# Altium PCB PCB.PcbDoc
Units mm, origin at the board's own origin, x right, y up, seen from the top; angles counter-clockwise.
Board outline 51.43 x 30.99 mm, 2 copper layers (Top Layer, Bottom Layer); 20 components, 9 nets, 53 pads, 6 vias.
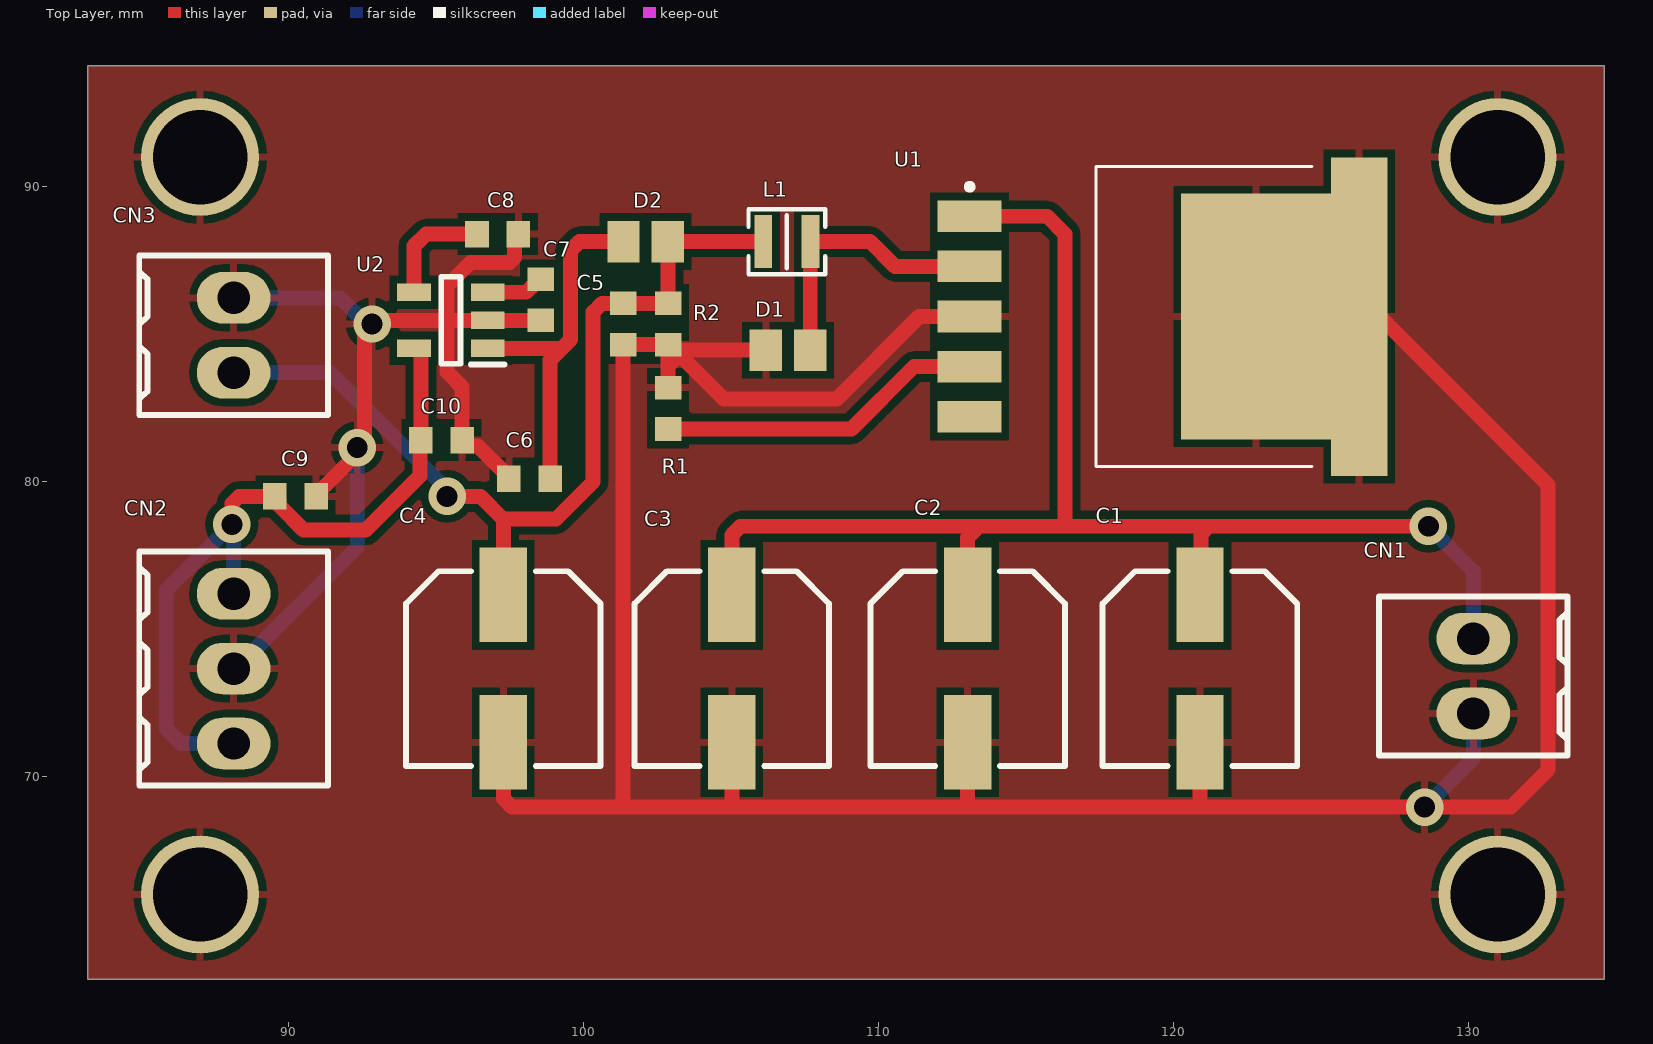
[diagram p0: Top Layer view]
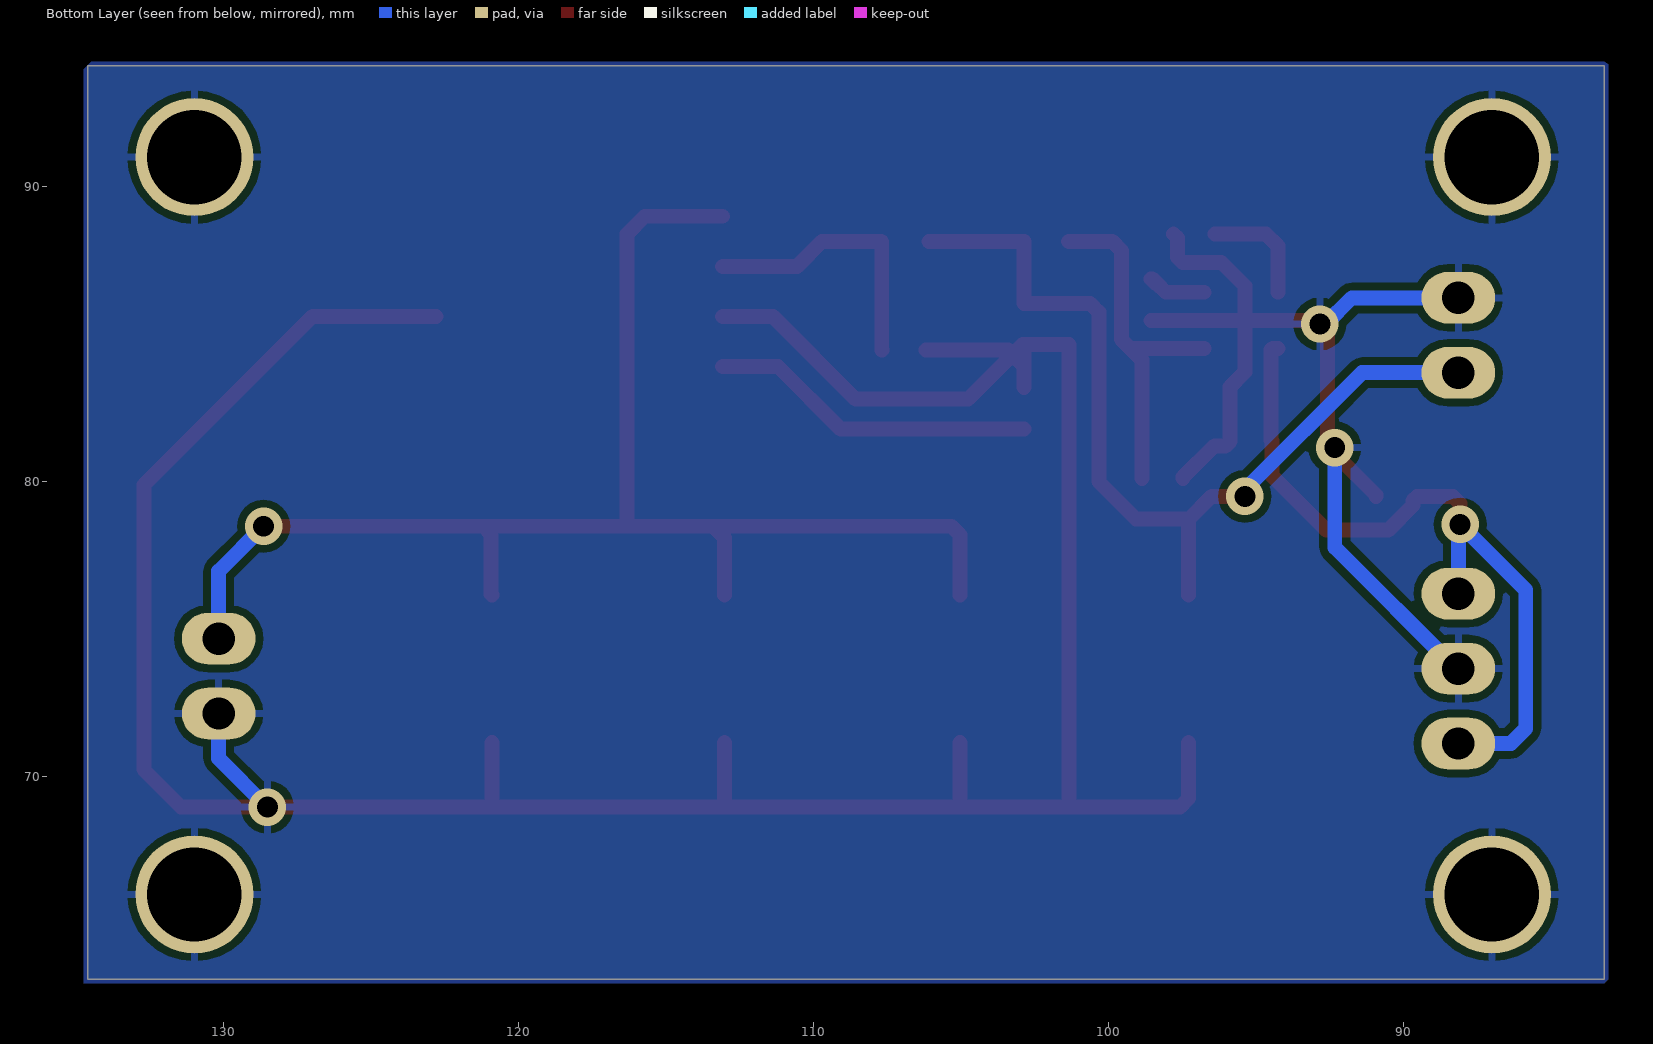
[diagram p1: Bottom Layer view, seen from below]

## Layer stack, top to bottom
Top Solder: solder mask 0.0102, Solder Resist, Dk 3.5
Top Layer: signal copper 0.0356
Dielectric 1: dielectric 0.32, FR-4, Dk 4.8
Bottom Layer: signal copper 0.0356
Bottom Solder: solder mask 0.0102, Solder Resist, Dk 3.5

## Board outline
83.185,63.119 83.185,94.107 134.62,94.107 134.62,63.119

## Design rules (kind name [scope] priority, off if disabled: settings)
Clearance [All] p1: gap=0.254 ignorepadtopadclearanceinfootprint=FALSE except(0: Arc-Hole Track-Hole SMDPad-Hole THPad-Hole Via-Hole Fill-Hole Poly-Hole Region-Hole Text-Hole)
PolygonConnect [All] p1: connectstyle=Relief reliefconductorwidth=0.254 reliefentries=4 polygonreliefangle="90 Angle" airgapwidth=0.254
RoomDefinition Converters [InComponentClass('Converters')] p1: confinementstyle=ConfineIn formatcopy=TRUE lockcomponents=FALSE outline 37.084,27.878 182.118,27.878 182.118,47.182 37.084,47.182
RoutingVias [All] p1: holewidth=0.711 width=1.27 viastyle="Through Hole" minholewidth=0.711 minwidth=1.27 maxholewidth=0.711 maxwidth=1.27
SolderMaskExpansion [All] p1: expansion=0.102 istentingtop=FALSE
Width [All] p1: maxlimit=0.508 minlimit=0.254 preferedwidth=0.508
30 further rules are at their usual default settings.

## Components (designator, comment, footprint, x,y, rotation, side; value= is the part's Value field where it differs from the comment)
C1 "47uF" "CAP ALSMD 6.6MM H6.1MM" 120.904,73.66 r270 top value=68µF
C2 "47uF" "CAP ALSMD 6.6MM H6.1MM" 113.03,73.66 r270 top value=68µF
C3 "47uF" "CAP ALSMD 6.6MM H6.1MM" 105.029,73.66 r270 top value=68µF
C4 "470uF" "CAP ALSMD 6.6MM H6.1MM" 97.282,73.66 r270 top value=68µF
C5 "X5R" 1608[0603] 101.346,85.344 r90 top value=1n2
C6 "X5R" 1608[0603] 98.171,80.104 r0 top value=1uF
C7 "X5R" 1608[0603] 98.552,86.168 r270 top value=100nF
C8 "X7R" 1608[0603] 97.09,88.392 r180 top value=10nF
C9 "X5R" 1608[0603] 90.235,79.502 r180 top value=1uF
C10 "X5R" 1608[0603] 95.185,81.407 r0 top value=100nF
CN1 "282834-2" "TE 282834-2" 130.175,73.406 r270 top
CN2 "282834-3" "TE 282834-3" 88.138,73.66 r90 top
CN3 "282834-2" "TE 282834-2" 88.138,84.963 r90 top
D1 "D Schottky" C0805 106.934,84.455 r0 top
D2 "BAT60JFILM" C0805 102.108,88.138 r180 top
L1 "120uH" "IND 0806_2016" 106.896,88.138 r180 top value="10 µH"
R1 "Res1" 1608[0603] 102.87,82.485 r270 top value=1K
R2 "Res1" 1608[0603] 102.87,85.344 r270 top value=3k1
U1 "LM2596S-ADJ" LM2596SXADJ 119.634,85.598 r180 top
U2 "LD3985M33R" SOT95P280X145-5N 95.504,85.471 r180 top

## Footprints (in the part's own frame and the unit in brackets; to place one, negate y for a bottom-side part, rotate by r counter-clockwise, add the part's x,y. Pads: shape width x height; smd on the part's side, far side on the other; paste and mask are expansions set on the pad)
1608[0603] [mm] "Chip Capacitor, Body 1.6x0.8mm, IPC High Density"
  rect 0.8x0.9 smd: 1(-0.7,0) 2(0.7,0)
  body extent -0.87,-0.48 0.87,0.48, height 1.3
C0805 [mm] "Chip Capacitor, Body 2.0x1.3mm, IPC High Density"
  rect 1.1x1.4 smd: 1(-0.75,0) 2(0.75,0)
  body extent -1.1,-0.72 1.1,0.72, height 1.4
"CAP ALSMD 6.6MM H6.1MM" [mm] "Aluminum Electrolytic Capacitor, Body 6.60x6.60x6.10mm, IPC Low Density"
  rect 3.2x1.6 smd: 1(-2.5,0) 2(2.5,0)
  silkscreen extent -3.3,-3.3 3.3,3.3, body extent -3.5,-3.3 3.5,3.3, height 6.1
"IND 0806_2016" [mm] "Chip Capacitor, 2-Leads, Body 2.00x1.20mm, IPC Medium Density"
  rect 0.6x1.8 smd: 1(-0.8,0) 2(0.8,0)
  silkscreen extent -1.3,-1.1 1.3,1.1, body extent -1.01,-0.91 1.01,0.91, height 1.81
LM2596SXADJ [mm]
  rect 2.16x1.07 smd: 1(6.545,-3.4) 2(6.545,-1.7) 3(6.545,0) 4(6.545,1.7) 5(6.545,3.4)
  rect 1.91x10.8 smd: T1(-6.67,0)
  rect 5.08x8.33 smd: T2(-3.175,0)
  silkscreen extent -5.06,-5.08 6.64,5.08
SOT95P280X145-5N [mm]
  rect 1.15x0.6 smd: 1(-1.25,0.95) 2(-1.25,0) 3(-1.25,-0.95) 4(1.25,-0.95) 5(1.25,0.95)
  silkscreen extent -1.83,-1.48 0.33,1.5, body extent -1.4,-1.48 1.4,1.48, height 1.45
"TE 282834-2" [mm]
  oval 1.75x2.5 hole 1.1: 1(-1.27,0) 2(1.27,0)
  silkscreen extent -2.7,-3.2 2.7,3.2, body extent -2.77,-3.25 2.77,3.25, height 10
"TE 282834-3" [mm]
  oval 1.75x2.5 hole 1.1: 1(-2.54,0) 2(0,0) 3(2.54,0)
  silkscreen extent -3.97,-3.2 3.97,3.2, body extent -4.04,-3.25 4.04,3.25, height 10

## Part data
C1 C2 C3 C4: library part UUD1C680MCL1GS, "CAP ALUM 68UF 20% 16V SMD", Capacitance=68µF, Device Package="Radial, Can - SMD", Lifetime @ Temp.="2000 Hrs @ 105°C", manufacturer=Nichicon, Operating Temperature="-55°C ~ 105°C", Ripple Current @ High Frequency="230mA @ 100kHz", Ripple Current @ Low Frequency="115mA @ 120Hz", Supplier Part Number 1=493-2261-1-ND, Tolerance=±20%, Voltage - Rated=16V, Applications="General Purpose", componentlink1description=Datasheet, componentlink1url=http://nichicon-us.com/english/products/pdfs/e-uud.pdf, componentlink2description="DigiKey Link", componentlink2url=http://digikey.com/product-detail/en/nichicon/UUD1C680MCL1GS/493-2261-1-ND/590236, Height - Seated (Max)="0.228\" (5.80mm)", Impedance="440 mOhms", lastupdated="9/2/2020 1:18:40 AM", Lifecycle Status=Active, Minimum Order=1, Mounting Type="Surface Mount", Package / Case="Radial, Can - SMD", packaging=TapeAndReel, Part Number=UUD1C680MCL1GS, Part Status=Active, partid=9018, Polarization=Polar, price=0.11, series=UUD, Size / Dimension="0.248\" Dia (6.30mm)", Supplier 1=DigiKey, Surface Mount Land Size="0.260\" L x 0.260\" W (6.60mm x 6.60mm)"
C5 C6 C7 C8 C9 C10: library part Cap, "Capacitor", LatestRevisionDate=17-Jul-2002, LatestRevisionNote="Re-released for DXP Platform.", PackageDescription="Radial Cap, Thru-Hole; 2 Leads; 0.3 in Pin Spacing", PackageReference=RAD-0.3, Published=8-Jun-2000, Publisher="Altium Limited"
CN1 CN3: "TERM BLK 2P SIDE ENT 2.54MM PCB", Color=Green, Current=10A, manufacturer="TE Connectivity AMP Connectors", Supplier Part Number 1=A98333-ND, Voltage=150V, componentlink1description=Datasheet, componentlink1url=https://www.te.com/commerce/DocumentDelivery/DDEController?Action=srchrtrv&DocNm=282834&DocType=Customer+Drawing&DocLang=English, componentlink2description="DigiKey Link", componentlink2url=http://digikey.com/product-detail/en/te-connectivity-amp-connectors/282834-2/A98333-ND/1150135, lastupdated="1/15/2020 4:15:38 AM", Lifecycle Status=Active, Mating Orientation="Horizontal with Board", Minimum Order=1, Mounting Type="Through Hole", Number of Levels=1, packaging=Bulk, Part Number=282834-2, Part Status=Active, Pitch="0.100\" (2.54mm)", Positions Per Level=2, price=0.88, series=Buchanan, Supplier 1=DigiKey, Wire Gauge="16-30 AWG", Wire Termination="Screw - Rising Cage Clamp"
CN2: "TERM BLK 3P SIDE ENT 2.54MM PCB", Color=Green, Current=10A, manufacturer="TE Connectivity AMP Connectors", Supplier Part Number 1=A98334-ND, Voltage=150V, componentlink1description=Datasheet, componentlink1url=https://www.te.com/commerce/DocumentDelivery/DDEController?Action=srchrtrv&DocNm=282834&DocType=Customer+Drawing&DocLang=English, componentlink2description="DigiKey Link", componentlink2url=http://digikey.com/product-detail/en/te-connectivity-amp-connectors/282834-3/A98334-ND/1153264, lastupdated="1/15/2020 4:15:50 AM", Lifecycle Status=Active, Mating Orientation="Horizontal with Board", Minimum Order=1, Mounting Type="Through Hole", Number of Levels=1, packaging=Bulk, Part Number=282834-3, Part Status=Active, Pitch="0.100\" (2.54mm)", Positions Per Level=3, price=2.01, series=Buchanan, Supplier 1=DigiKey, Wire Gauge="16-30 AWG", Wire Termination="Screw - Rising Cage Clamp"
D1: "Schottky Diode", Code_JEDEC=DO-214-AA, LatestRevisionDate=17-Jul-2002, LatestRevisionNote="Re-released for DXP Platform.", PackageDescription="DO-214-AA/SMB; 2 C-Bend Leads; Body 5.3 x 3.6 mm, inc. leads (LxW)", PackageReference=SMB, Published=8-Jun-2000, Publisher="Altium Limited"
D2: library part Diode, "Default Diode", Code_JEDEC=DO-214-AB, LatestRevisionDate=17-Jul-2002, LatestRevisionNote="Re-released for DXP Platform.", PackageDescription="DO-214-AB/SMC; 2 C-Bend Leads; Body 7.9 x 5.9 mm, inc. leads (LxW)", PackageReference=SMC, PackageVersion=Sep-1996, Published=8-Jun-2000, Publisher="Altium Limited"
L1: library part SDED20161T-100MS, "FIXED IND 10UH 470MA 1.119OHM SM", Current - Saturation=550mA, Current Rating (Amps)="470 mA", DC Resistance (DCR)="1.119Ohm Max", Device Package="0806 (2016 Metric)", Inductance="10 µH", Inductance Frequency - Test="1 MHz", manufacturer="Delta Electronics/Cyntec", Operating Temperature="-55°C ~ 125°C", Supplier Device Package=0806, Supplier Part Number 1=2037-SDED20161T-100MSCT-ND, Tolerance=±20%, componentlink1description=Datasheet, componentlink1url=http://www.cyntec.com/upfile/products/download/SDED20161T-000%20(A6).pdf, componentlink2description="DigiKey Link", componentlink2url=https://www.digikey.com/en/products/detail/delta-electronics-cyntec/SDED20161T-100MS/9761144, Height - Seated (Max)="0.039\" (1.00mm)", lastupdated="2/4/2023 8:56:44 PM", Lifecycle Status=Active, Material - Core="0806 (2016 Metric)", Minimum Order=1, Mounting Type="Surface Mount", Package / Case="0806 (2016 Metric)", packaging=TapeAndReel, Part Number=SDED20161T-100MS, Part Status=Active, partid=2783, price=0.08, series=SDED20161T, Shielding=Shielded, Size / Dimension="0.079\" L x 0.063\" W (2.00mm x 1.60mm)", Supplier 1=DigiKey
R1 R2: "Resistor", LatestRevisionDate=17-Jul-2002, LatestRevisionNote="Re-released for DXP Platform.", PackageDescription="Axial Device, Thru-Hole; 2 Leads; 0.3 in Pin Spacing", PackageReference=AXIAL-0.3, Published=8-Jun-2000, Publisher="Altium Limited"
U1: "Integrated Circuit", Manufacturer_Name="Texas Instruments", Mouser Part Number=926-LM2596S-ADJ, Datasheet Link=https://www.ti.com/lit/ds/symlink/lm2596.pdf?HQS=ti-null-null-sf-df-pf-sep-wwe&ts=1592978195629, Height=4.57mm, Manufacturer_Part_Number=LM2596S-ADJ, Mouser Price/Stock=https://www.mouser.co.uk/ProductDetail/Texas-Instruments/LM2596S-ADJ?qs=X1J7HmVL2ZGmRmhAtwKZ2Q%3D%3D
U2: "Integrated Circuit", Manufacturer_Name=STMicroelectronics, Mouser Part Number=511-LD3985M33R, Arrow Part Number=LD3985M33R, Arrow Price/Stock=https://www.arrow.com/en/products/ld3985m33r/stmicroelectronics?region=nac, Datasheet Link=http://www.st.com/st-web-ui/static/active/en/resource/technical/document/datasheet/CD00003395.pdf, Height=1.45mm, Manufacturer_Part_Number=LD3985M33R, Mouser Price/Stock=https://www.mouser.co.uk/ProductDetail/STMicroelectronics/LD3985M33R?qs=22WmWNTp1rrPOccVv4HZ7A%3D%3D

## Free pads (board coordinates)
  round 4 hole 3.2: 2(87,66) 2(87,91) 2(131,66) 2(131,91)

## Via types
v1: diameter 1.27, hole 0.711, Top Layer to Bottom Layer, 6 vias

## Nets (pads, with @x,y where several pads share a name; then routed paths per layer and width w, separated by ;. In a path a pad name is that pad's centre, name@x,y a point inside that pad or via, vN(x,y) a via of type N, cw(c..) or ccw(c..) an arc to the next point about the centre after c; other vN are vias at no path point)
3V3: C9.2 C10.1 CN2.1 CN2.3 U2.5 | length 25.8
  Top Layer w0.508: v1(88.075,78.549) 88.075,79.251 88.326,79.502 C9.2 89.681,79.356 89.681,79.188 90.51,78.359 92.618,78.359 94.454,80.195 94.454,81.376 C10.1 94.485,84.475 94.439,84.521 U2.5
  Bottom Layer w0.508: CN2.1 86.36,71.12 85.852,71.628 85.852,76.327 v1(88.075,78.549) 88.138,78.486 CN2.3
5V: C4.1 C5.2 CN3.1 D2.1 L1.2 R2.1 | length 31.2
  Top Layer w0.508: v1(95.377,79.502) 96.505,79.502 97.267,78.74 97.282,78.74 ; C4.1 97.282,78.74 ; L1.2 D2.1 102.864,88.132 102.864,86.05 R2.1 C5.2 100.628,86.044 100.33,85.746 100.33,79.995 99.075,78.74 97.282,78.74
  Bottom Layer w0.508: CN3.1 91.405,83.693 95.377,79.721 v1(95.377,79.502)
24V: C1.1 C2.1 C3.1 CN1.1 U1.1 | length 48.6
  Top Layer w0.508: C3.1 105.029,78.188 105.327,78.486 113.411,78.486 ; C2.1 113.03,78.105 113.411,78.486 ; U1.1 115.726,88.998 116.332,88.392 116.332,78.613 116.459,78.486 ; C1.1 120.94,76.196 120.94,78.224 121.202,78.486 ; v1(128.651,78.486) 121.202,78.486 ; 113.411,78.486 116.459,78.486 ; 116.459,78.486 121.202,78.486
  Bottom Layer w0.508: v1(128.651,78.486) 130.175,76.962 CN1.1
GND: C1.2 C2.2 C3.2 C4.2 C5.1 C6.1 C7.2 C8.1 C9.1 C10.2 CN1.2 CN2.2 CN3.2 D1.1 pad.2 R1.1 R2.2 U1.3 U1.T1 U1.T2 U2.2 | length 142.6
  Top Layer w0.508: C9.1 90.935,79.552 v1@92.583,81.2 ; v1(92.329,81.153) 92.536,81.153 v1@92.583,81.2 ; v1@92.583,85.173 v1@92.583,81.2 ; v1@92.881,85.471 95.377,85.471 ; C4.2 97.282,69.259 97.58,68.961 101.304,68.961 ; C6.1 97.471,80.154 96.414,81.211 96.031,81.211 95.885,81.357 C10.2 95.885,83.21 95.377,83.718 95.377,85.471 ; C8.1 97.664,88.266 97.664,87.606 97.492,87.434 96.174,87.434 95.377,86.637 95.377,85.471 ; C7.2 98.551,85.469 96.756,85.469 U2.2 95.377,85.471 ; R1.1 102.87,83.914 ; C3.2 105.029,68.961 ; D1.1 103.411,84.455 102.87,83.914 ; C2.2 113.03,68.961 ; U1.3 111.379,85.598 108.585,82.804 104.76,82.804 103.26,84.304 102.92,84.644 R2.2 ; C1.2 120.904,69.088 120.777,68.961 ; U1.T2 U1.T1 127,85.598 132.715,79.883 132.715,70.231 131.445,68.961 120.777,68.961 ; 101.304,68.961 105.029,68.961 ; 101.304,68.961 101.346,69.003 C5.1 R2.2 ; 102.87,83.914 R2.2 ; 105.029,68.961 113.03,68.961 ; 113.03,68.961 120.777,68.961
  Bottom Layer w0.508: CN2.2 88.217,73.66 92.329,77.772 v1(92.329,81.153) ; CN3.2 91.75,86.233 92.639,85.344 v1(92.837,85.344) ; v1(128.524,68.961) 130.175,70.612 CN1.2
NetC6_2: C6.2 D2.2 U2.1 | length 12.5
  Top Layer w0.508: U2.1 99.27,84.521 ; C6.2 98.871,84.122 99.27,84.521 ; D2.2 99.866,88.138 99.568,87.84 99.568,84.819 99.27,84.521
NetC7_1: C7.1 U2.3 | length 2.2
  Top Layer w0.508: U2.3 98.058,86.421 98.356,86.719 98.356,86.722 98.502,86.868 C7.1 C7.1@98.406,86.722
NetC8_2: C8.2 U2.4 | length 3.9
  Top Layer w0.508: U2.4 94.254,87.987 94.659,88.392 C8.2
NetD1_2: D1.2 L1.1 U1.2 | length 9.4
  Top Layer w0.508: D1.2 107.69,84.461 107.69,88.132 L1.1 109.723,88.138 110.563,87.298 U1.2
NetR1_2: R1.2 U1.4 | length 11.1
  Top Layer w0.508: R1.2 109.09,81.785 111.203,83.898 U1.4
pads on no net: U1.5

## Polygon pours and split planes (outlines as drawn)
GND on Top Layer "GND_L01_P000" (solid, pour order 0): 83.185,94.107 134.62,94.107 134.62,63.119 83.185,63.119
GND on Bottom Layer "GND_L02_P001" (solid, pour order 1): 83.058,63.119 83.185,62.992 134.747,62.992 134.747,93.98 134.493,94.234 83.185,94.234 83.058,94.149

## Silkscreen, mask and mechanical layers (free items; w line width, h text height)
Mechanical 1:
  lines w0.254: 83.185,63.119 83.185,94.107 94.393,94.107 120.11,94.107 134.62,94.107 134.62,63.119 83.185,63.119